# EAGLE board Logica (EAGLE 9.6.2)
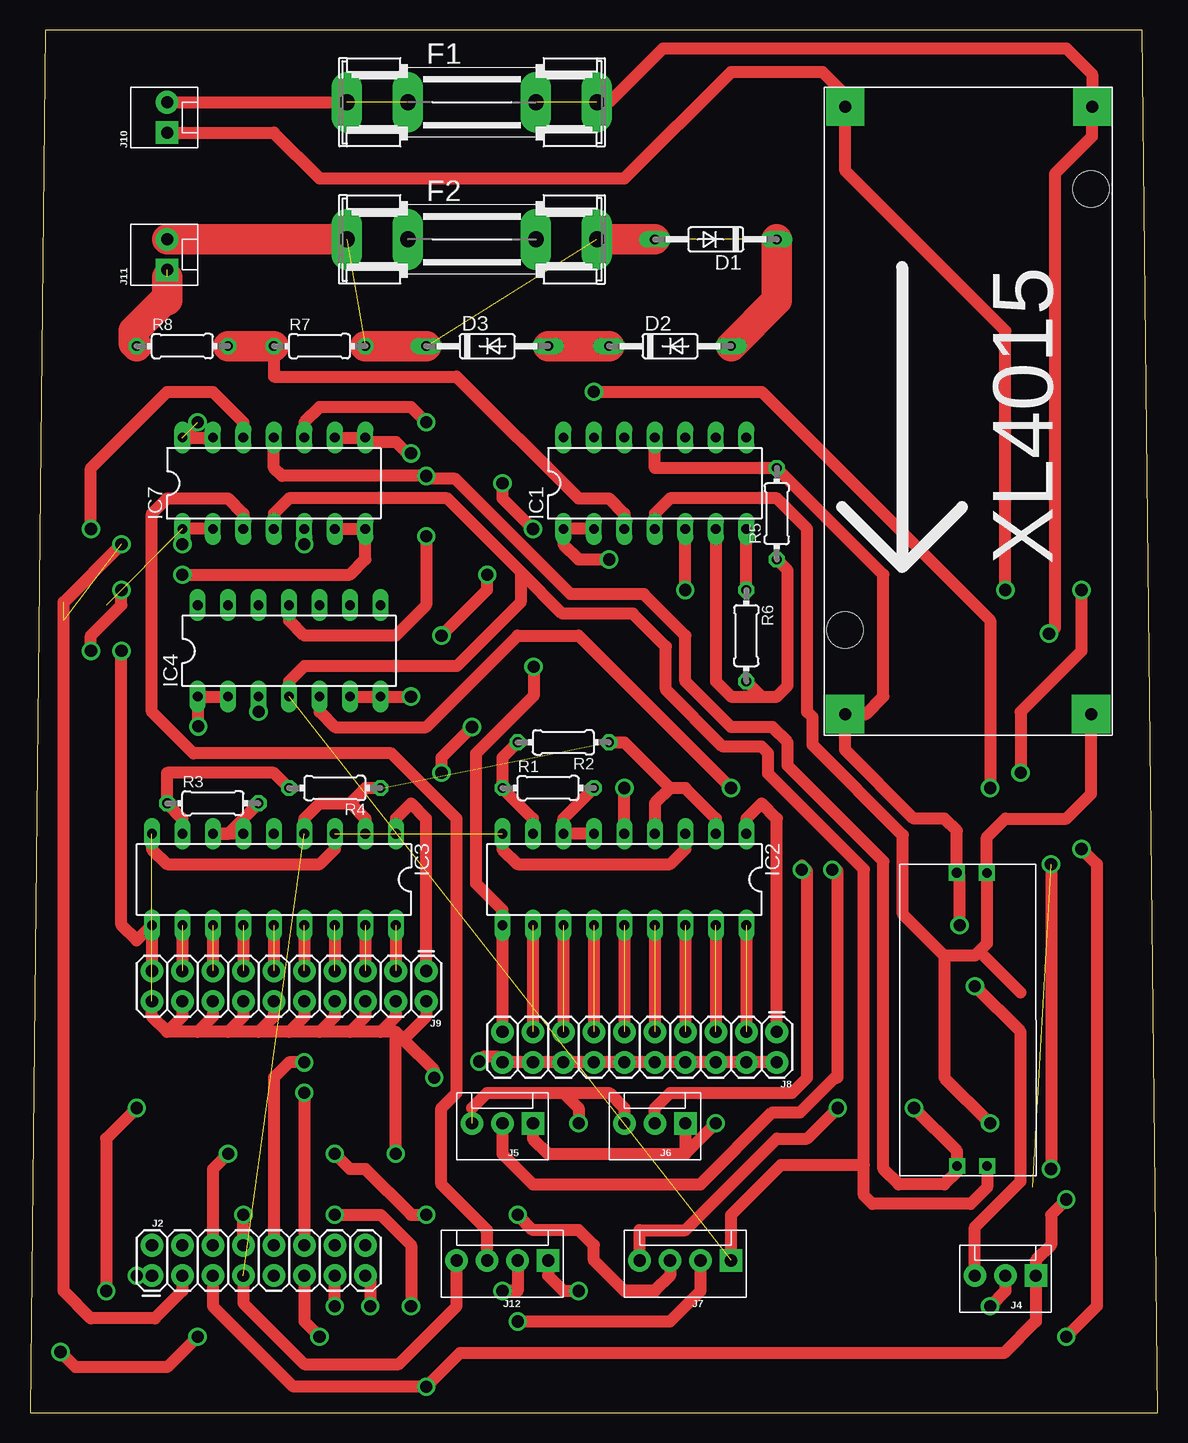
[diagram p0: board, top side]
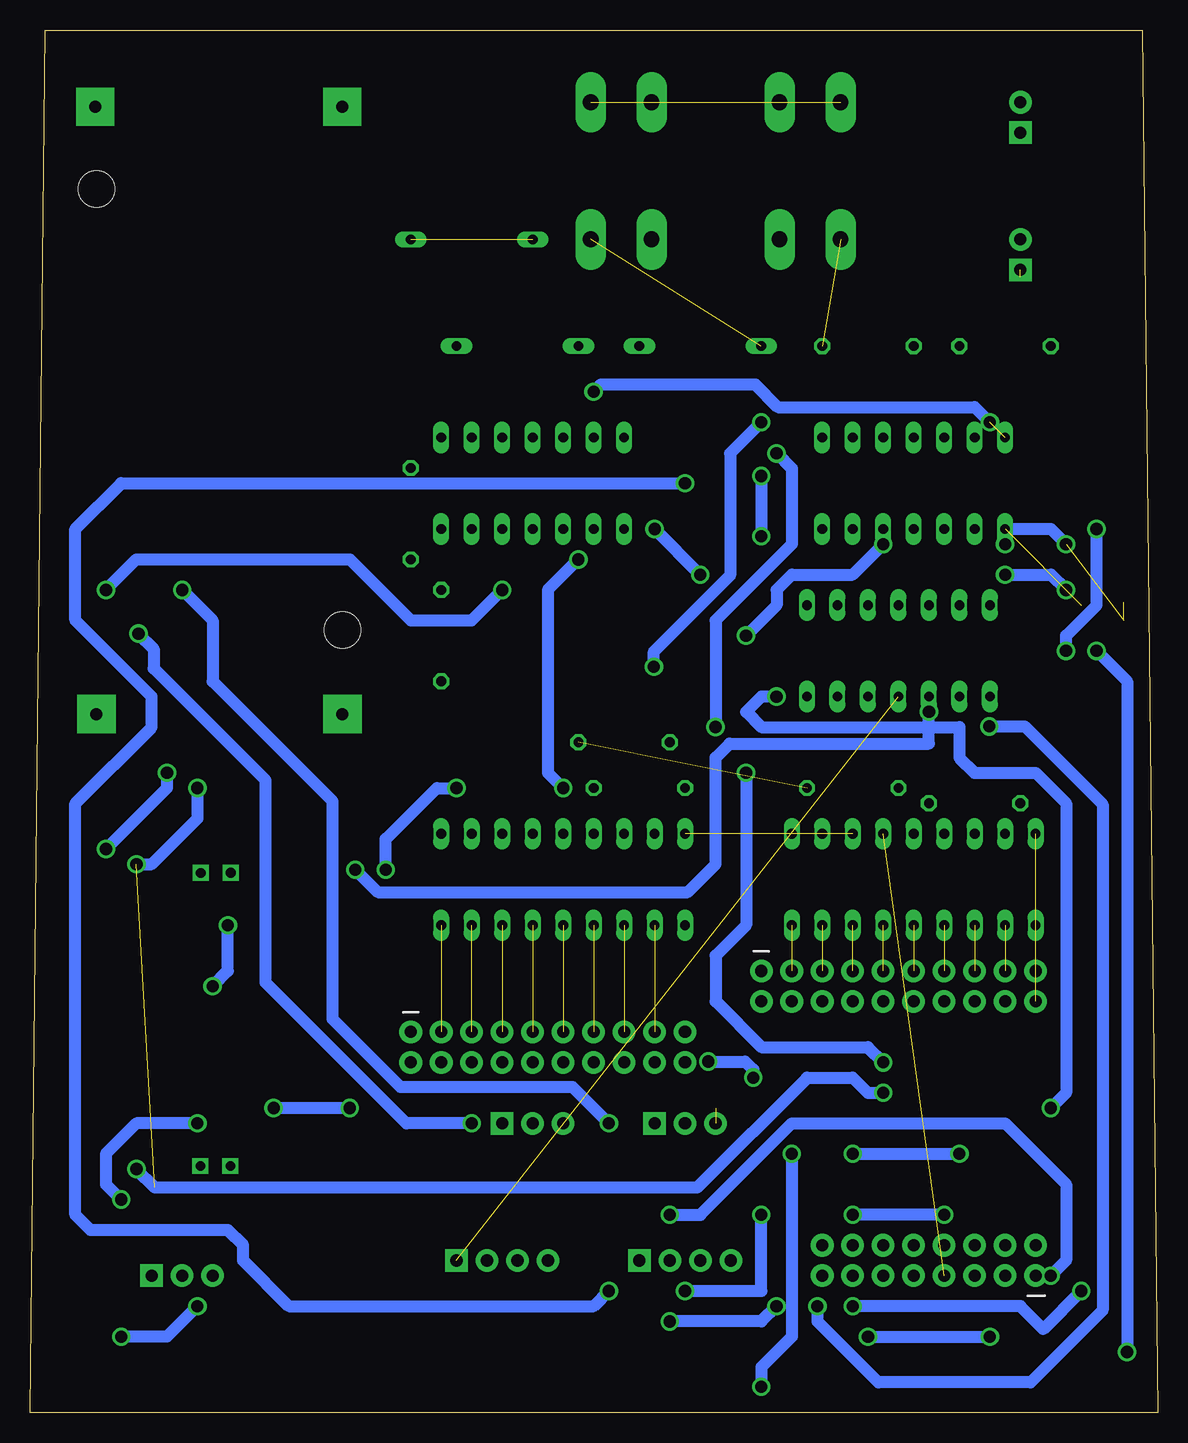
[diagram p1: board, bottom side, seen from below]

Size 93.96 x 115.24 mm. Coordinates in mm from the lower left corner, seen from the top.
Outline: 0,0 93.96,0 92.69,115.24 1.27,115.24 0,0
Copper layers (1*16): Top 0.035mm / dielectric 1.5mm / Bottom 0.035mm
Design rules "default": minimum track width 6mil, minimum drill 0.35mm, track to track 6mil, track to pad 6mil, pad to pad 6mil, via to via 6mil, smd to smd 6mil, copper to edge 40mil, drill to drill 6mil, minimum pad ring 10mil, minimum via ring 8mil, stop-mask expansion 4mil, vias tented up to drill 0mil, thermal gap 10mil
Net classes: 0 default: width 0.762 mm, drill 1.016 mm, clearance 0.61 mm; 1 POWER: width 2.54 mm, drill 1.016 mm, clearance 0.61 mm

## Footprints (pad centres in the part's own frame; a part is rotated, then mirrored left to right if it is on the bottom)
DO35-10 = drill 0.813 long: A 5.08,0; C -5.08,0
SHK20L = drill 1.321 pad 2.54 long: 1A -10.414,0; 1B -5.334,0; 2A 10.414,0; 2B 5.334,0
DIL14 = drill 0.813 long: 1 -7.62,-3.81; 2 -5.08,-3.81; 3 -2.54,-3.81; 4 0,-3.81; 5 2.54,-3.81; 6 5.08,-3.81; 7 7.62,-3.81; 8 7.62,3.81; 9 5.08,3.81; 10 2.54,3.81; 11 0,3.81; 12 -2.54,3.81; 13 -5.08,3.81; 14 -7.62,3.81
DIL18 = drill 0.813 long: 1 -10.16,-3.81; 2 -7.62,-3.81; 3 -5.08,-3.81; 4 -2.54,-3.81; 5 0,-3.81; 6 2.54,-3.81; 7 5.08,-3.81; 8 7.62,-3.81; 9 10.16,-3.81; 10 10.16,3.81; 11 7.62,3.81; 12 5.08,3.81; 13 2.54,3.81; 14 0,3.81; 15 -2.54,3.81; 16 -5.08,3.81; 17 -7.62,3.81; 18 -10.16,3.81
2X8 = drill 1.016 pad 1.88: 1 0,0; 2 0,2.54; 3 2.54,0; 4 2.54,2.54; 5 5.08,0; 6 5.08,2.54; 7 7.62,0; 8 7.62,2.54; 9 10.16,0; 10 10.16,2.54; 11 12.7,0; 12 12.7,2.54; 13 15.24,0; 14 15.24,2.54; 15 17.78,0; 16 17.78,2.54
MOLEX-1X3 = drill 1.016 pad 1.88 square: 1 0,0 | drill 1.016 pad 1.88: 2 2.54,0; 3 5.08,0
MOLEX-1X4 = drill 1.016 pad 1.88 square: 1 0,0 | drill 1.016 pad 1.88: 2 2.54,0; 3 5.08,0; 4 7.62,0
2X10 = drill 1.016 pad 1.88: 1 0,0; 2 0,2.54; 3 2.54,0; 4 2.54,2.54; 5 5.08,0; 6 5.08,2.54; 7 7.62,0; 8 7.62,2.54; 9 10.16,0; 10 10.16,2.54; 11 12.7,0; 12 12.7,2.54; 13 15.24,0; 14 15.24,2.54; 15 17.78,0; 16 17.78,2.54; 17 20.32,0; 18 20.32,2.54; 19 22.86,0; 20 22.86,2.54
MOLEX-1X2 = drill 1.016 pad 1.88 square: 1 0,0 | drill 1.016 pad 1.88: 2 2.54,0
0204/7 = drill 0.813 octagon: 1 -3.81,0; 2 3.81,0
XL4015 = drill 1.016 pad 3.175 square: IN+ -11.049,-25.019; IN- 9.521,-25.019 | drill 1 pad 3.175 square: OUT+ -10.95,25.58; OUT- 9.55,25.58 | hole 3: 9.55,18.58; -10.95,-18.17
LEVELSHIFTER = drill 0.813 square: GNDIN -11.988,-1.504; GNDOUT 12.45,-1.48; VIN -11.98,1; VOUT 12.45,1.02

## Placement (x,y rotation side)
D1  1N4446  [DO35-10]  57.15,97.79 180 top
D2  1N4446  [DO35-10]  53.34,88.9 0 top
D3  1N4446  [DO35-10]  38.1,88.9 0 top
F1  FUSESHK20L  [SHK20L]  36.83,109.22 0 top
F2  FUSESHK20L  [SHK20L]  36.83,97.79 0 top
IC1  MCP604P  [DIL14]  52.07,77.47 0 top
IC2  LM3914N  [DIL18]  49.53,44.45 180 top
IC3  LM3914N  [DIL18]  20.32,44.45 180 top
IC4  MCP604P  [DIL14]  21.59,63.5 0 top
IC7  MCP604P  [DIL14]  20.32,77.47 0 top
J2  [2X8]  10.16,11.43 0 top
J4  [MOLEX-1X3]  83.82,11.43 180 top
J5  [MOLEX-1X3]  41.91,24.13 180 top
J6  [MOLEX-1X3]  54.61,24.13 180 top
J7  [MOLEX-1X4]  58.42,12.7 180 top
J8  [2X10]  62.23,31.75 180 top
J9  [2X10]  33.02,36.83 180 top
J10  [MOLEX-1X2]  11.43,106.68 90 top
J11  [MOLEX-1X2]  11.43,95.25 90 top
J12  [MOLEX-1X4]  43.18,12.7 180 top
R1  [0204/7]  43.18,52.07 0 top
R2  [0204/7]  44.45,55.88 180 top
R3  [0204/7]  15.24,50.8 0 top
R4  [0204/7]  25.4,52.07 180 top
R5  [0204/7]  62.23,74.93 90 top
R6  [0204/7]  59.69,64.77 270 top
R7  [0204/7]  24.13,88.9 0 top
R8  [0204/7]  12.7,88.9 0 top
U$1  XL4015  [XL4015]  77.47,83.82 180 top
U$2  LEVELSHIFTER  [LEVELSHIFTER]  78.74,33.02 270 top

## Library data of the parts
D1-D3 = diode
F1 F2 = fuse; OC_FARNELL: unknown; OC_NEWARK: unknown
IC1 IC4 IC7 = linear
IC2 IC3 = national-semiconductor
J2 J8 J9 = SparkFun-Connectors
J4-J6 = SparkFun-Connectors; PROD_ID: CONN-08625; SF_ID: PRT-08096
J7 J12 = SparkFun-Connectors; PROD_ID: CONN-08186; SF_ID: PRT-08231
J10 J11 = SparkFun-Connectors; SF_ID: PRT-09918
R1-R8 = rcl; SPICEPREFIX: R
U$1 = ReguladorXI4015
U$2 = LEVELSHIFTER

## Nets
3.3V: IC4.4 IC7.4 J2.2 J7.1 U$2.VOUT
5V: IC1.4 IC2.3 IC2.9 IC3.3 IC3.9 J2.5 J4.1 J8.2 J8.4 J8.6 J8.8 J8.10 J8.12 J8.14 J8.16 J8.18 J8.20 J9.2 J9.4 J9.6 J9.8 J9.10 J9.12 J9.14 J9.16 J9.18 J9.20 U$1.OUT+ U$2.VIN
11V: F1.1A F1.2A J5.1 J6.1 J10.2 U$1.IN+
36V: D1.A D1.C D2.A D3.C F2.1A F2.2A J11.2 R7.2
ACELERADOR: IC7.3 J12.3
ADC: J2.1 J7.3
BAT: IC7.13 IC7.14 J2.12
BAT_COMP: IC1.1 IC1.2 IC2.5
DAC: IC7.1 IC7.2 J2.3
ENCODER: IC7.5 J12.1
FRENO: J2.6 J12.2
FRENO1: J2.8 J7.2
GND: IC2.2 IC2.4 IC3.2 IC3.4 J2.7 J12.4 R2.1 R4.1
GND_3.3V: IC4.11 IC7.11 J7.4 U$2.GNDOUT
GND_5V: IC1.11 J4.3 R5.2 U$1.OUT- U$2.GNDIN
GND_11V: J5.3 J6.3 J10.1 U$1.IN-
GND_36V: J11.1 R8.1
IN_36V: IC1.3 R7.1 R8.2
INDUCTIVO1: IC4.1 IC4.2 J2.15
INDUCTIVO1_IN: IC4.3 J5.2
INDUCTIVO2: IC4.6 IC4.7 J2.13
INDUCTIVO2_IN: IC4.5 J6.2
L1: IC2.10 IC7.10 J8.19
L2: IC2.11 J8.17
L2_1: IC3.10 IC7.12 J9.19
L2_2: IC3.11 J9.17
L2_3: IC3.12 J9.15
L2_4: IC3.13 J9.13
L2_5: IC3.14 J9.11
L2_6: IC3.15 J9.9
L2_7: IC3.16 J9.7
L2_8: IC3.17 J9.5
L2_9: IC3.18 J9.3
L2_10: IC3.1 J9.1
L3: IC2.12 J8.15
L4: IC2.13 J8.13
L5: IC2.14 J8.11
L6: IC2.15 J8.9
L7: IC2.16 J8.7
L8: IC2.17 J8.5
L9: IC2.18 J8.3
L10: IC2.1 J8.1
N$1: IC3.6 IC3.7 R3.2
N$2: J2.4
N$3: IC2.6 IC2.7 R1.2
N$4: IC3.8 R3.1 R4.2
N$5: IC2.8 R1.1 R2.2
N$6: IC1.7 R6.1
N$7: IC1.6 R5.1 R6.2
N$8: D2.C D3.A
N$12: J2.9
PTA12: IC7.6 IC7.7 J2.11
SCL: J2.16
SDA: J2.14
TEMP: IC7.8 IC7.9 J2.10
TEMP_IN: IC1.5 J4.2
TEMP_SEñAL: IC3.5

## Tracks (layer width: path | path; a pad name or v marks a point on that pad's centre or on a via)
3.3V  (1 unrouted)
  Top 1.016: U$2.VOUT 79.76,18.8 78.38,17.42 70.21,17.42 69.49,18.14 69.49,20.68 | 69.49,20.68 69.49,45.29 61.52,53.26 61.52,54.97 60.96,55.52 57.75,55.52 52.98,60.29 52.98,63.86 50.24,66.6 44.37,66.6 40.88,70.09 | IC7.4 20.32,74.93 21.59,76.2 34.77,76.2 40.88,70.09 | 40.88,70.09 40.88,67.55 35.56,62.23 22.86,62.23 21.59,60.96 IC4.4 | J7.1 58.42,16.51 62.59,20.68 69.49,20.68
5V  (via drill 1.02)  (2 unrouted)
  Top 1.016: U$1.OUT+ 88.42,51.59 86.36,49.53 81.28,49.53 79.74,47.99 U$2.VIN 79.74,39.1 79.1,38.47 | IC1.4 52.07,74.93 53.34,76.2 62.23,76.2 64.77,73.66 64.77,58.42 65.22,57.98 65.22,55.68 72.75,48.15 72.75,41.55 76.2,38.1 | 79.1,38.47 78.74,38.1 76.2,38.1 | 82.55,35.02 79.1,38.47 | J2.5 15.24,8.89 21.95,2.18 v33.02,2.18 35.81,4.98 81.18,4.98 83.82,7.62 J4.1 83.82,12.7 85.09,13.97 85.09,16.51 v86.36,17.78 | 30.48,31.75 29.21,31.75 | 29.21,31.75 26.67,31.75 | 26.67,31.75 24.13,31.75 | 24.13,31.75 21.59,31.75 | 21.59,31.75 19.05,31.75 | 19.05,31.75 16.51,31.75 | 16.51,31.75 13.97,31.75 | 13.97,31.75 11.43,31.75 | 11.43,31.75 10.16,33.02 J9.20 | v30.48,21.59 30.48,31.75 | 31.12,31.12 30.48,31.75 | J9.18 12.7,33.02 11.43,31.75 | J9.16 15.24,33.02 13.97,31.75 | J9.14 17.78,33.02 16.51,31.75 | J9.12 20.32,33.02 19.05,31.75 | J9.10 22.86,33.02 21.59,31.75 | J9.8 25.4,33.02 24.13,31.75 | J9.6 27.94,33.02 26.67,31.75 | J9.4 30.48,33.02 29.21,31.75 | J9.2 33.02,33.02 31.12,31.12 | J8.2 J8.4 J8.6 J8.8 J8.10 J8.12 J8.14 J8.16 J8.18 J8.20 38.89,29.69 37.85,29.69 v37.44,29.28 | v33.68,27.94 33.68,28.55 31.12,31.12 | IC2.9 39.37,46.99 40.64,45.72 53.34,45.72 54.61,46.99 IC2.3 | IC3.9 10.16,46.99 11.43,45.72 24.13,45.72 25.4,46.99 IC3.3 | v80.01,24.13 76.2,27.94 76.2,38.1
  Bottom 1.016: v30.48,21.59 30.48,6.35 33.02,3.81 v33.02,2.18 | v37.44,29.28 34.36,29.28 33.68,28.6 v33.68,27.94 | v80.01,24.13 85.09,24.13 87.63,21.59 87.63,19.05 v86.36,17.78
11V  (via drill 1.02)  (1 unrouted)
  Top 1.016: J10.2 F1.1A | J5.1 41.91,22.86 43.18,21.59 54.61,21.59 | J6.1 54.61,21.59 | F1.2A 48.26,109.22 52.76,113.72 86.36,113.72 88.52,111.56 U$1.IN+ 88.52,106.37 85.4,103.24 85.4,65.41 v84.92,64.94 | 54.61,21.59 v57.15,24.13
  Bottom 1.016: v57.15,24.13 62.6,24.13 74.32,35.85 74.32,52.71 83.65,62.04 83.65,63.67 v84.92,64.94
36V  (3 unrouted)
  Top 2.54: J11.2 F2.1A | F2.2A D1.A | D2.A 62.23,92.71 D1.C | D3.C R7.2
ACELERADOR
  Top 1.016: J12.3 38.1,15.24 34.29,19.05 34.29,25.4 35.56,26.67 35.56,49.53 30.12,54.97 13.61,54.97 10.16,58.42 10.16,74.93 11.43,76.2 16.51,76.2 17.78,74.93 IC7.3
ADC  (via drill 1.02)
  Top 1.016: J7.3 53.34,11.43 52.07,10.16 49.53,10.16 46.99,12.7 46.99,13.97 45.72,15.24 41.91,15.24 v40.64,16.51 | v8.89,11.43 J2.1
  Bottom 1.016: v40.64,16.51 38.1,16.51 30.48,24.13 12.7,24.13 7.62,19.05 7.62,12.7 v8.89,11.43
BAT  (via drill 1.02)  (2 unrouted)
  Top 1.016: IC7.13 IC7.14 v13.97,82.55 | v46.99,85.09 60.96,85.09 80.01,66.04 v80.01,52.07 | v85.09,45.72 v85.09,20.32 | v22.86,26.67 J2.12
  Bottom 1.016: v13.97,82.55 15.24,83.82 31.63,83.82 33.51,85.7 46.38,85.7 v46.99,85.09 | v80.01,52.07 80.01,49.53 83.82,45.72 v85.09,45.72 | v85.09,20.32 83.56,18.79 38.36,18.79 29.21,27.94 25.4,27.94 24.13,26.67 v22.86,26.67
BAT_COMP  (via drill 1.02)
  Top 1.016: IC1.2 IC1.1 44.45,72.39 45.72,71.12 v48.26,71.12 | IC2.5 v49.53,52.07
  Bottom 1.016: v48.26,71.12 50.8,68.58 50.8,53.34 v49.53,52.07
DAC  (via drill 1.02)  (3 unrouted)
  Top 1.016: J2.3 12.7,10.16 10.41,7.87 5.08,7.87 2.79,10.16 2.79,67.56 v7.62,72.39 | IC7.2 IC7.1 v12.7,72.39
  Bottom 1.016: v12.7,72.39 IC7.1 8.89,73.66 v7.62,72.39
ENCODER  (via drill 1.02)
  Top 1.016: v39.37,77.47 39.37,76.2 v41.91,73.66 | IC7.5 v22.86,72.39 | v38.1,69.85 38.1,68.58 v34.29,64.77 | J12.1 43.18,11.43 44.45,10.16 v45.72,10.16
  Bottom 1.016: v45.72,10.16 46.99,8.89 72.39,8.89 76.2,12.7 76.2,13.97 77.47,15.24 88.9,15.24 90.17,16.51 90.17,50.8 83.82,57.15 83.82,59.69 90.17,66.04 90.17,73.66 86.36,77.47 v39.37,77.47 | v34.29,64.77 31.75,67.31 31.75,68.58 30.48,69.85 25.4,69.85 v22.86,72.39 | v38.1,69.85 v41.91,73.66
FRENO  (via drill 1.02)
  Top 1.016: J12.2 40.64,10.16 v39.37,10.16 | v16.51,21.59 15.24,20.32 J2.6 | v25.4,21.59 26.67,20.32 27.94,20.32 31.75,16.51 v33.02,16.51
  Bottom 1.016: v39.37,10.16 33.02,10.16 v33.02,16.51 | v25.4,21.59 v16.51,21.59
FRENO1  (via drill 1.02)
  Top 1.016: v25.4,16.51 29.21,16.51 31.75,13.97 v31.75,8.89 | v40.64,7.62 53.34,7.62 55.88,10.16 J7.2 | J2.8 v17.78,16.51
  Bottom 1.016: v17.78,16.51 v25.4,16.51 | v31.75,8.89 33.02,7.62 v40.64,7.62
GND  (2 unrouted)
  Top 1.016: J2.7 17.78,9.14 22.86,4.06 30.73,4.06 35.56,8.89 J12.4 | IC2.2 57.15,49.53 54.61,52.07 53.34,52.07 | 53.34,52.07 52.07,50.8 IC2.4 | R2.1 49.53,55.88 53.34,52.07 | IC3.4 22.86,49.53 24.13,50.8 26.67,50.8 | 26.67,50.8 27.94,49.53 IC3.2 | R4.1 27.94,52.07 26.67,50.8
GND_3.3V  (via drill 1.02)
  Top 1.016: IC7.11 20.32,78.74 20.98,78.08 v33.02,78.08 33.02,77.83 35.45,77.83 45.05,68.22 51.16,68.22 54.61,64.77 54.61,60.96 58.42,57.15 61.87,57.15 63.14,55.88 63.14,53.94 71.12,45.96 71.12,20.32 72.39,19.05 76.2,19.05 77.26,20.11 U$2.GNDOUT 77.26,21.8 v73.66,25.4 | v33.02,73.05 33.02,67.31 30.48,64.77 22.86,64.77 21.59,66.04 IC4.11 | J7.4 50.8,15.24 54.61,15.24 62.23,22.86 64.77,22.86 v67.31,25.4
  Bottom 1.016: v33.02,78.08 v33.02,73.05 | v67.31,25.4 v73.66,25.4
GND_5V  (via drill 1.02)
  Top 1.016: IC1.11 52.07,78.74 R5.2 71.12,69.85 71.12,59.69 69.67,58.24 U$1.OUT- 67.92,55.27 73.66,49.53 76.2,49.53 77.24,48.49 U$2.GNDIN 77.47,44.77 v77.47,40.64 | J4.3 78.74,15.48 82.55,19.29 82.55,31.75 v78.74,35.56
  Bottom 1.016: v78.74,35.56 77.47,36.83 v77.47,40.64
GND_11V  (via drill 1.02)  (1 unrouted)
  Top 1.016: J10.1 20.32,106.68 24.13,102.87 49.53,102.87 58.42,111.76 66.04,111.76 67.95,109.85 U$1.IN- 67.95,103.5 81.28,90.17 v81.28,68.58 | 36.83,25.4 38.1,26.67 44.45,26.67 | J6.3 49.53,25.4 48.26,26.67 44.45,26.67 | 44.45,26.67 45.72,25.4 v45.72,24.13
  Bottom 1.016: v81.28,68.58 78.74,66.04 78.74,60.96 68.74,50.96 68.74,32.81 63.08,27.15 48.74,27.15 v45.72,24.13
GND_36V  (1 unrouted)
  Top 2.54: R8.1 8.64,89.15 8.64,90.17 11.18,92.71 11.43,92.71 11.43,94.64
IN_36V
  Top 1.016: R7.1 20.32,86.36 35.56,86.36 45.72,76.2 48.26,76.2 49.53,74.93 IC1.3
  Top 2.54: R7.1 R8.2
INDUCTIVO1  (via drill 1.02)
  Top 1.016: IC4.2 IC4.1 13.97,57.15 v14.03,57.21 | J2.15 28.35,11.02 v28.35,8.89
  Bottom 1.016: v14.03,57.21 11.08,57.21 4.57,50.7 4.57,8.53 10.57,2.54 23.27,2.54 28.35,7.62 v28.35,8.89
INDUCTIVO1_IN  (via drill 1.02)
  Top 1.016: v66.86,45.27 67.04,45.45 67.31,45.17 67.31,27.94 67.07,27.94 64.17,25.04 61.87,25.04 55.88,19.05 41.91,19.05 39.37,21.59 J5.2 | v19.05,58.42 IC4.3
  Bottom 1.016: v66.86,45.27 64.98,43.39 39.16,43.39 36.83,45.72 36.83,54.61 35.66,55.78 19.05,55.78 v19.05,58.42
INDUCTIVO2  (via drill 1.02)
  Top 1.016: IC4.6 IC4.7 v31.75,59.69 | v8.89,25.4 6.35,22.86 v6.35,10.16 | v25.4,8.89 J2.13
  Bottom 1.016: v31.75,59.69 33.02,59.69 34.29,58.42 33.02,57.15 16.51,57.15 16.51,54.61 15.24,53.34 10.16,53.34 7.62,50.8 7.62,26.67 v8.89,25.4 | v6.35,10.16 9.52,6.98 11.43,8.89 v25.4,8.89
INDUCTIVO2_IN  (via drill 1.02)
  Top 1.016: J6.2 52.07,25.4 53.34,26.67 63.5,26.67 64.77,27.94 64.77,45.17 64.32,45.63 v64.32,45.27 | v58.42,52.07 45.72,64.77 40.64,64.77 33.02,57.15 25.4,57.15 24.13,58.42 IC4.5
  Bottom 1.016: v64.32,45.27 64.32,47.81 60.05,52.07 v58.42,52.07
L1  (via drill 1.02)
  Top 1.016: J8.19 IC2.10 39.37,41.91 37.19,44.09 37.19,54.97 41.97,59.75 v41.97,62.17 | IC7.10 22.86,82.55 24.13,83.82 31.75,83.82 v33.02,82.55
  Bottom 1.016: v41.97,62.17 41.97,63.44 35.62,69.79 35.62,79.95 v33.02,82.55
L2  (1 unrouted)
  Top 1.016: IC2.11 J8.17
L2_1  (via drill 1.02)
  Top 1.016: J9.19 IC3.10 8.89,39.37 7.62,40.64 v7.62,63.5 | v5.08,73.66 5.08,78.74 11.43,85.09 15.24,85.09 17.78,82.55 IC7.12
  Bottom 1.016: v7.62,63.5 7.62,64.77 5.08,67.31 v5.08,73.66
L2_2  (1 unrouted)
  Top 1.016: IC3.11 J9.17
L2_3  (1 unrouted)
  Top 1.016: IC3.12 J9.15
L2_4  (1 unrouted)
  Top 1.016: IC3.13 J9.13
L2_5  (1 unrouted)
  Top 1.016: IC3.14 J9.11
L2_6  (1 unrouted)
  Top 1.016: IC3.15 J9.9
L2_7  (1 unrouted)
  Top 1.016: IC3.16 J9.7
L2_8  (1 unrouted)
  Top 1.016: IC3.17 J9.5
L2_9  (1 unrouted)
  Top 1.016: IC3.18 J9.3
L2_10
  Top 1.016: IC3.1 30.48,49.53 31.75,50.8 33.02,49.53 J9.1
L3  (1 unrouted)
  Top 1.016: IC2.12 J8.15
L4  (1 unrouted)
  Top 1.016: IC2.13 J8.13
L5  (1 unrouted)
  Top 1.016: IC2.14 J8.11
L6  (1 unrouted)
  Top 1.016: IC2.15 J8.9
L7  (1 unrouted)
  Top 1.016: IC2.16 J8.7
L8  (1 unrouted)
  Top 1.016: IC2.17 J8.5
L9  (1 unrouted)
  Top 1.016: IC2.18 J8.3
L10
  Top 1.016: IC2.1 59.69,49.53 60.96,50.8 62.23,49.53 J8.1
N$1
  Top 1.016: R3.2 16.51,48.26 IC3.7 IC3.6
N$3
  Top 1.016: IC2.6 IC2.7 44.45,49.53 R1.2
N$4
  Top 1.016: IC3.8 12.7,49.53 R3.1 11.43,53.34 20.32,53.34 R4.2
N$5
  Top 1.016: IC2.8 41.91,49.53 R1.1 39.37,54.61 R2.2
N$6
  Top 1.016: R6.1 IC1.7
N$7
  Top 1.016: R6.2 60.96,59.69 | 60.96,59.69 62.23,59.69 63.14,60.6 63.14,70.21 R5.1 | IC1.6 57.15,60.96 58.42,59.69 60.96,59.69
N$8
  Top 2.54: D2.C D3.A
PTA12  (via drill 1.02)
  Top 1.016: IC7.6 IC7.7 27.94,71.12 26.67,69.85 v12.7,69.85 | J2.11 22.86,7.62 v24.13,6.35 | v13.97,6.35 11.43,3.81 3.81,3.81 v2.54,5.08 | v5.08,63.5 5.08,64.77 7.62,67.31 v7.62,68.58
  Bottom 1.016: v24.13,6.35 v13.97,6.35 | v2.54,5.08 2.54,60.96 v5.08,63.5 | v7.62,68.58 8.89,69.85 v12.7,69.85
TEMP  (via drill 1.02)
  Top 1.016: IC7.9 IC7.8 28.3,80.92 30.48,80.92 31.45,79.96 v31.75,79.96 | v36.83,57.15 34.29,54.61 v34.29,53.34 | v22.86,29.21 21.59,29.21 20.32,27.94 J2.10
  Bottom 1.016: v31.75,79.96 30.48,78.69 30.48,72.39 36.83,66.04 v36.83,57.15 | v34.29,53.34 34.29,40.64 36.83,38.1 36.83,34.29 33.02,30.48 24.13,30.48 v22.86,29.21
TEMP_IN  (via drill 1.02)
  Top 1.016: J4.2 81.28,10.16 v80.01,8.89 | v87.63,46.99 88.9,45.72 88.9,8.89 v86.36,6.35 | v82.55,53.34 82.55,58.42 87.63,63.5 v87.63,68.58 | v54.61,68.58 IC1.5
  Bottom 1.016: v80.01,8.89 82.55,6.35 v86.36,6.35 | v87.63,46.99 82.55,52.07 v82.55,53.34 | v87.63,68.58 85.09,71.12 67.31,71.12 62.23,66.04 57.15,66.04 v54.61,68.58